# EAGLE board pfeffer_sub_curcuit_2 (EAGLE 8.0.0)
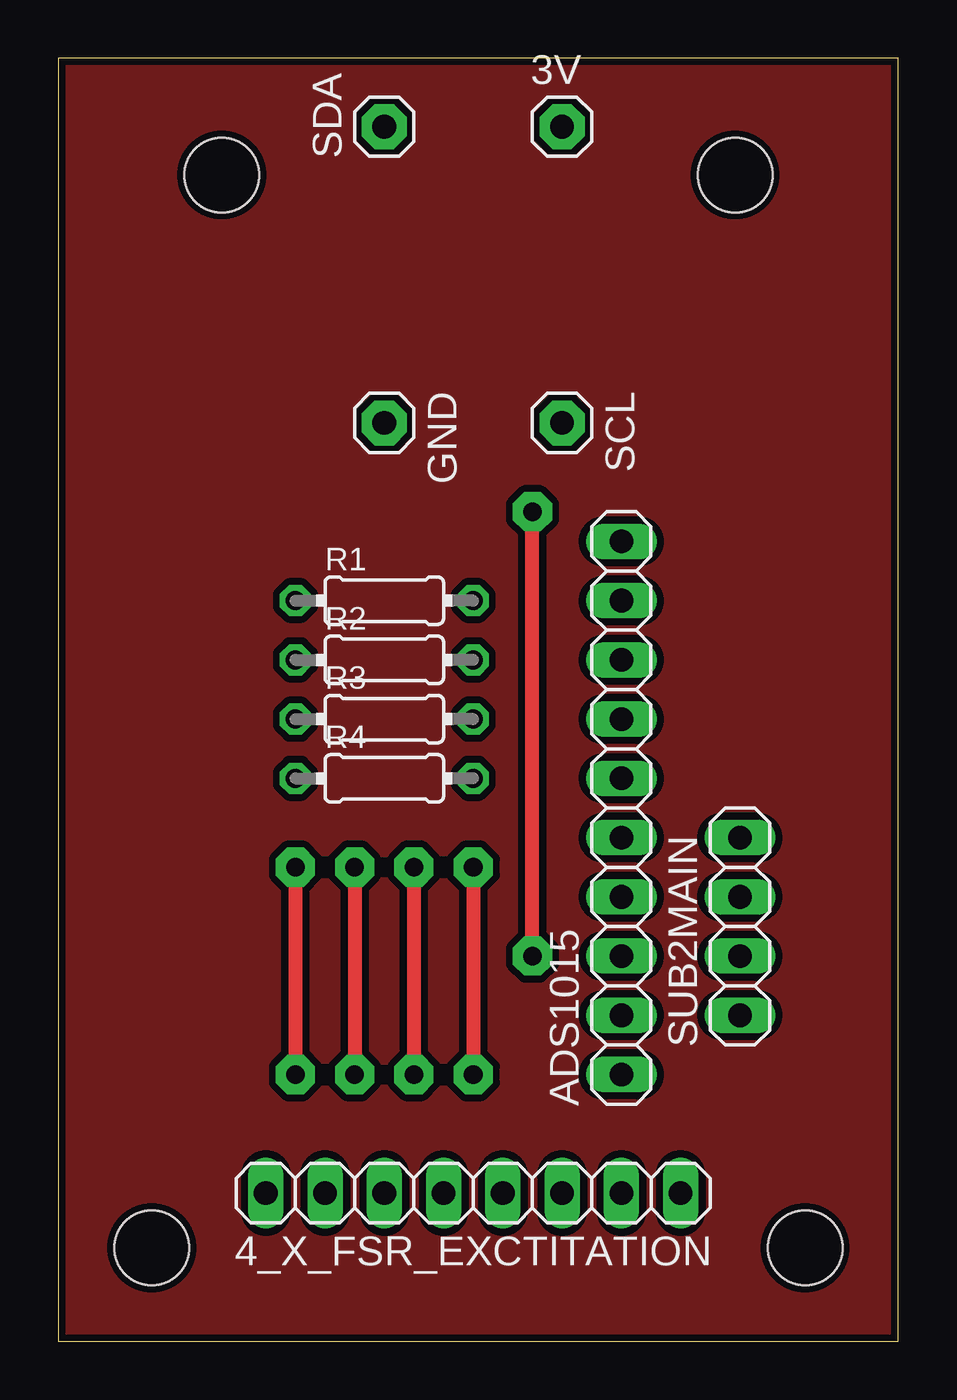
[diagram p0: board, top side]
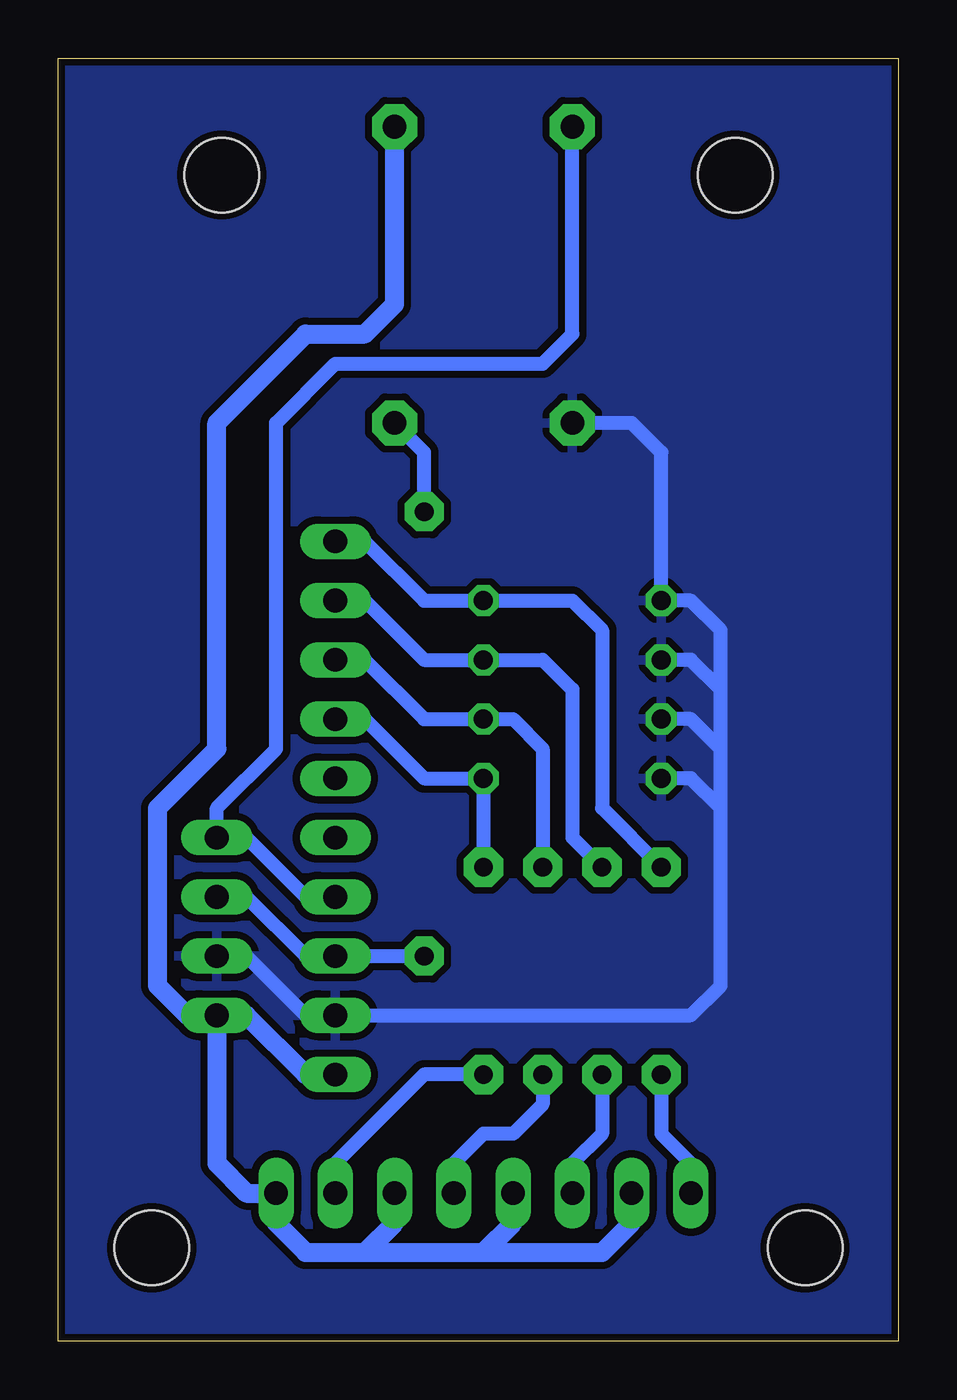
[diagram p1: board, bottom side, seen from below]

Size 36 x 55 mm. Coordinates in mm from the lower left corner, seen from the top.
Outline: 0,0 36,0 36,55 0,55 0,0
Copper layers (1*16): Top 0.035mm / dielectric 1.5mm / Bottom 0.035mm
Design rules "LoetLab": minimum track width 10mil, minimum drill 24mil, track to track 12mil, track to pad 12mil, pad to pad 12mil, via to via 12mil, smd to smd 10mil, copper to edge 12mil, drill to drill 12mil, minimum pad ring 10mil, minimum via ring 10mil, stop-mask expansion 4mil, vias tented up to drill 0mil, thermal gap 12mil
Holes 3.2 mm at 4,4 32,4 29,50 7,50

## Footprints (pad centres in the part's own frame; a part is rotated, then mirrored left to right if it is on the bottom)
1X01 = drill 1.016 pad 1.93 octagon: 1 0,0
1X08 = drill 1.016 long: 1 -8.89,0; 2 -6.35,0; 3 -3.81,0; 4 -1.27,0; 5 1.27,0; 6 3.81,0; 7 6.35,0; 8 8.89,0
1X10 = drill 1.016 long: 1 -11.43,0; 2 -8.89,0; 3 -6.35,0; 4 -3.81,0; 5 -1.27,0; 6 1.27,0; 7 3.81,0; 8 6.35,0; 9 8.89,0; 10 11.43,0
0204/7 = drill 0.813 octagon: 1 -3.81,0; 2 3.81,0
1X04 = drill 1.016 long: 1 -3.81,0; 2 -1.27,0; 3 1.27,0; 4 3.81,0

## Placement (x,y rotation side)
3V  [1X01]  21.59,52.07 0 top
4_X_FSR_EXCTITATION  [1X08]  17.78,6.35 180 top
ADS1015  [1X10]  24.13,22.86 90 top
GND  [1X01]  13.97,39.37 270 top
R1  10k  [0204/7]  13.97,31.75 0 top
R2  10k  [0204/7]  13.97,29.21 0 top
R3  10k  [0204/7]  13.97,26.67 0 top
R4  10k  [0204/7]  13.97,24.13 0 top
SCL  [1X01]  21.59,39.37 270 top
SDA  [1X01]  13.97,52.07 90 top
SUB2MAIN  [1X04]  29.21,17.78 90 top

## Library data of the parts
3V GND SCL SDA = adafruit
4_X_FSR_EXCTITATION ADS1015 SUB2MAIN = pinhead
R1-R4 = rcl

## Nets
GND: ADS1015.2 GND.1 R1.1 R2.1 R3.1 R4.1 SUB2MAIN.2
N$1: 4_X_FSR_EXCTITATION.8 ADS1015.10 R1.2
N$2: 4_X_FSR_EXCTITATION.6 ADS1015.9 R2.2
N$3: ADS1015.3 SCL.1 SUB2MAIN.3
N$4: ADS1015.4 SDA.1 SUB2MAIN.4
N$5: 4_X_FSR_EXCTITATION.4 ADS1015.8 R3.2
N$6: 4_X_FSR_EXCTITATION.2 ADS1015.7 R4.2
VCC: 3V.1 4_X_FSR_EXCTITATION.1 4_X_FSR_EXCTITATION.3 4_X_FSR_EXCTITATION.5 4_X_FSR_EXCTITATION.7 ADS1015.1 SUB2MAIN.1

## Tracks (layer width: path | path; a pad name or v marks a point on that pad's centre or on a via)
GND
  Bottom 0.61: SUB2MAIN.2 27.94,16.51 25.4,13.97 ADS1015.2 8.89,13.97 7.62,15.24 7.62,22.86 | 7.62,22.86 8.89,24.13 R4.1 | 7.62,22.86 7.62,25.4 | 7.62,25.4 8.89,26.67 R3.1 | 7.62,25.4 7.62,27.94 | 7.62,27.94 8.89,29.21 R2.1 | 7.62,27.94 7.62,30.48 8.89,31.75 R1.1 10.16,38.1 11.43,39.37 GND.1
  pour Bottom: 0,55 0,0 36,0 36,55
N$1  (via drill 0.8 pad 1.68)
  Top 0.61: v10.16,20.32 v10.16,11.43
  Bottom 0.61: ADS1015.10 22.86,34.29 20.32,31.75 R1.2 13.97,31.75 12.7,30.48 12.7,22.86 v10.16,20.32 | v10.16,11.43 10.16,8.89 8.89,7.62 4_X_FSR_EXCTITATION.8
N$2  (via drill 0.8 pad 1.68)
  Top 0.61: v12.7,20.32 v12.7,11.43
  Bottom 0.61: ADS1015.9 22.86,31.75 20.32,29.21 R2.2 15.24,29.21 13.97,27.94 13.97,21.59 v12.7,20.32 | v12.7,11.43 12.7,8.89 13.97,7.62 4_X_FSR_EXCTITATION.6
N$3  (via drill 0.8 pad 1.68)
  Top 0.61: v20.32,16.51 v20.32,35.56
  Bottom 0.61: SUB2MAIN.3 27.94,19.05 25.4,16.51 ADS1015.3 v20.32,16.51 | v20.32,35.56 20.32,38.1 SCL.1
N$4
  Bottom 0.61: ADS1015.4 25.4,19.05 27.94,21.59 SUB2MAIN.4 29.21,22.86 26.67,25.4 26.67,39.37 24.13,41.91 15.24,41.91 13.97,43.18 SDA.1
N$5  (via drill 0.8 pad 1.68)
  Top 0.61: v15.24,20.32 v15.24,11.43
  Bottom 0.61: ADS1015.8 22.86,29.21 20.32,26.67 R3.2 16.51,26.67 15.24,25.4 v15.24,20.32 | v15.24,11.43 15.24,10.16 16.51,8.89 17.78,8.89 19.05,7.62 4_X_FSR_EXCTITATION.4
N$6  (via drill 0.8 pad 1.68)
  Top 0.61: v17.78,20.32 v17.78,11.43
  Bottom 0.61: ADS1015.7 22.86,26.67 20.32,24.13 R4.2 v17.78,20.32 | 4_X_FSR_EXCTITATION.2 24.13,7.62 20.32,11.43 v17.78,11.43
N$7
  pour Top: 0,55 0,0 36,0 36,55
VCC
  Bottom 0.813: ADS1015.1 25.4,11.43 27.94,13.97 SUB2MAIN.1 | SUB2MAIN.1 29.21,7.62 27.94,6.35 4_X_FSR_EXCTITATION.1 26.67,5.08 25.4,3.81 22.86,3.81 | 22.86,3.81 21.59,5.08 4_X_FSR_EXCTITATION.3 | 22.86,3.81 17.78,3.81 | 17.78,3.81 16.51,5.08 4_X_FSR_EXCTITATION.5 | 17.78,3.81 12.7,3.81 11.43,5.08 4_X_FSR_EXCTITATION.7 | SUB2MAIN.1 30.48,13.97 31.75,15.24 31.75,22.86 29.21,25.4 29.21,39.37 25.4,43.18 22.86,43.18 21.59,44.45 3V.1

## Text on the board
tStop: VCC | SCL | SDA | GND